# Altium PCB CNC-Control.PcbDoc
Units mil, origin at the board's own origin, x right, y up, seen from the top; angles counter-clockwise.
Board outline 5511.81 x 3543.31 mil, 2 copper layers (Top Layer, Bottom Layer); 75 components, 84 nets, 371 pads, 70 vias.
Unrouted connection lines stored in the file: 2.
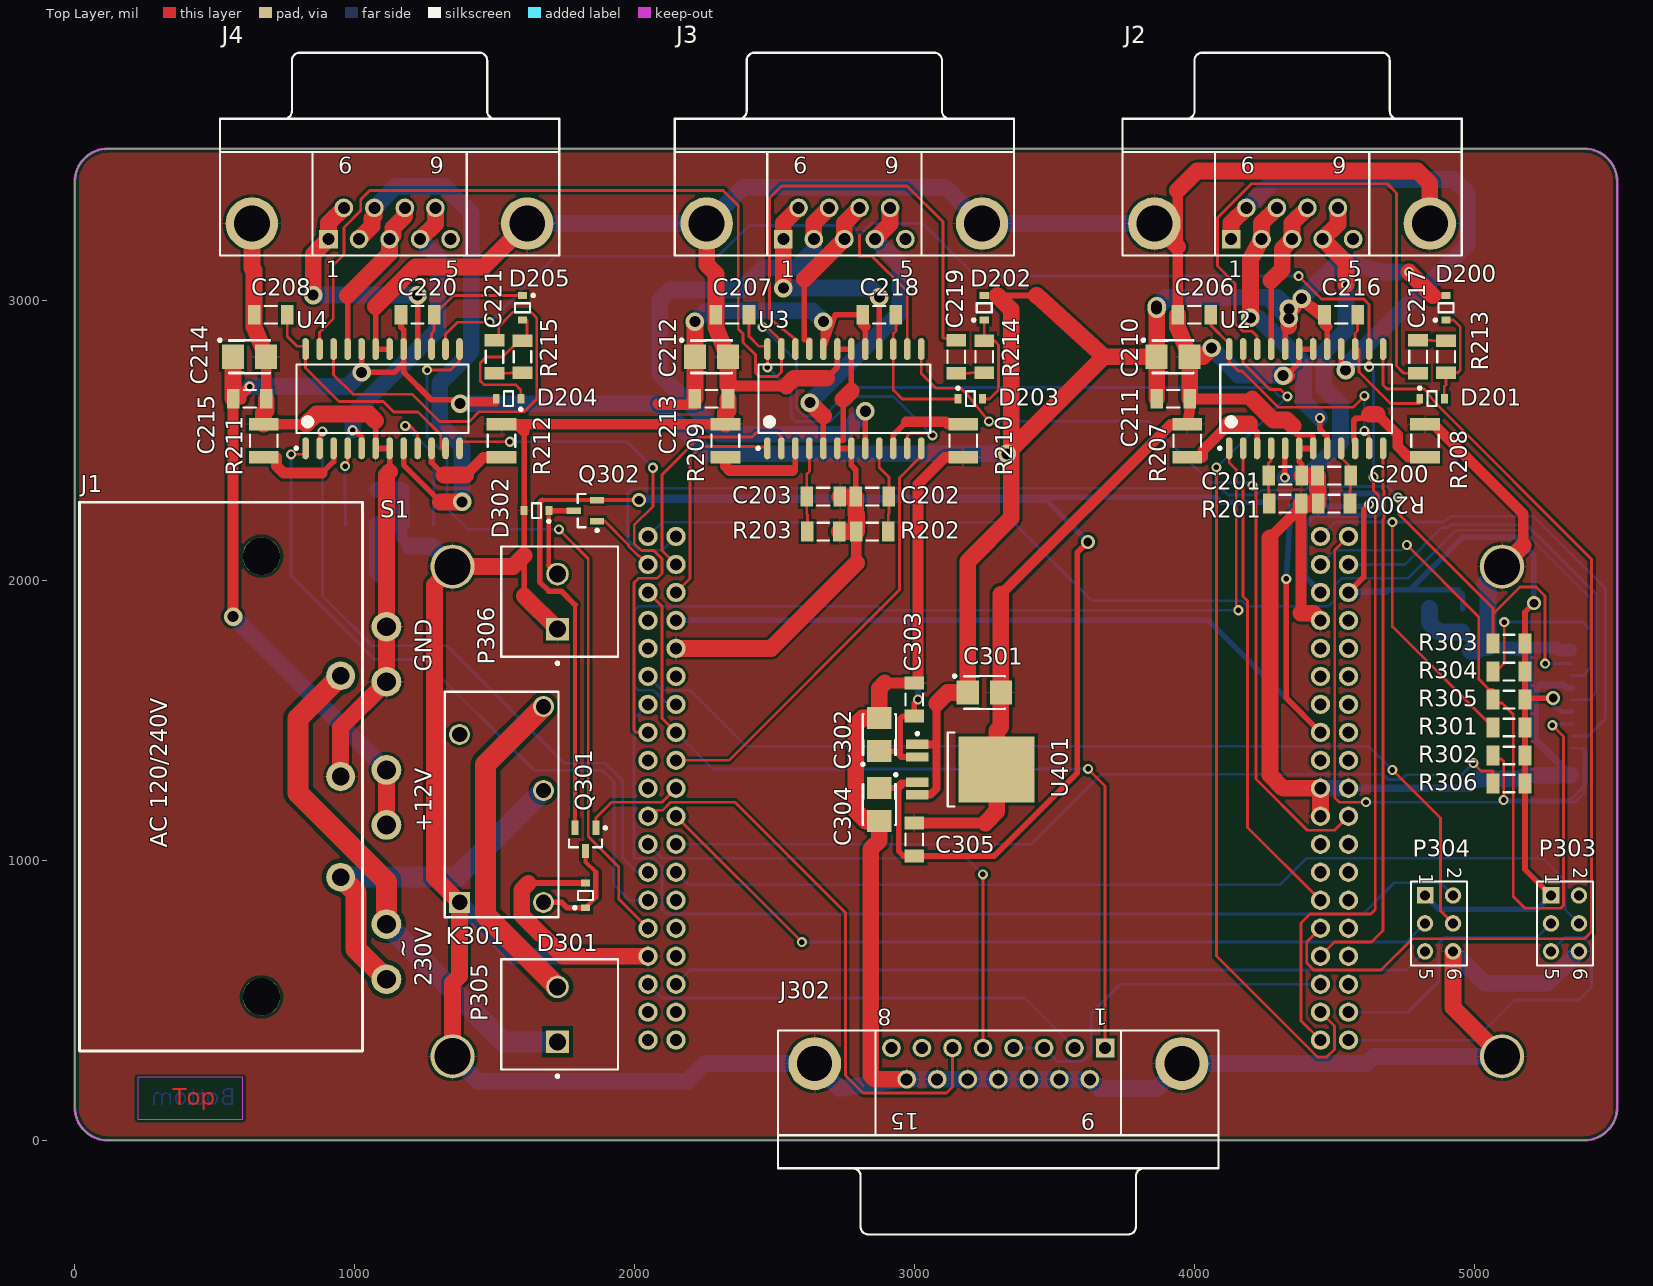
[diagram p0: Top Layer view]
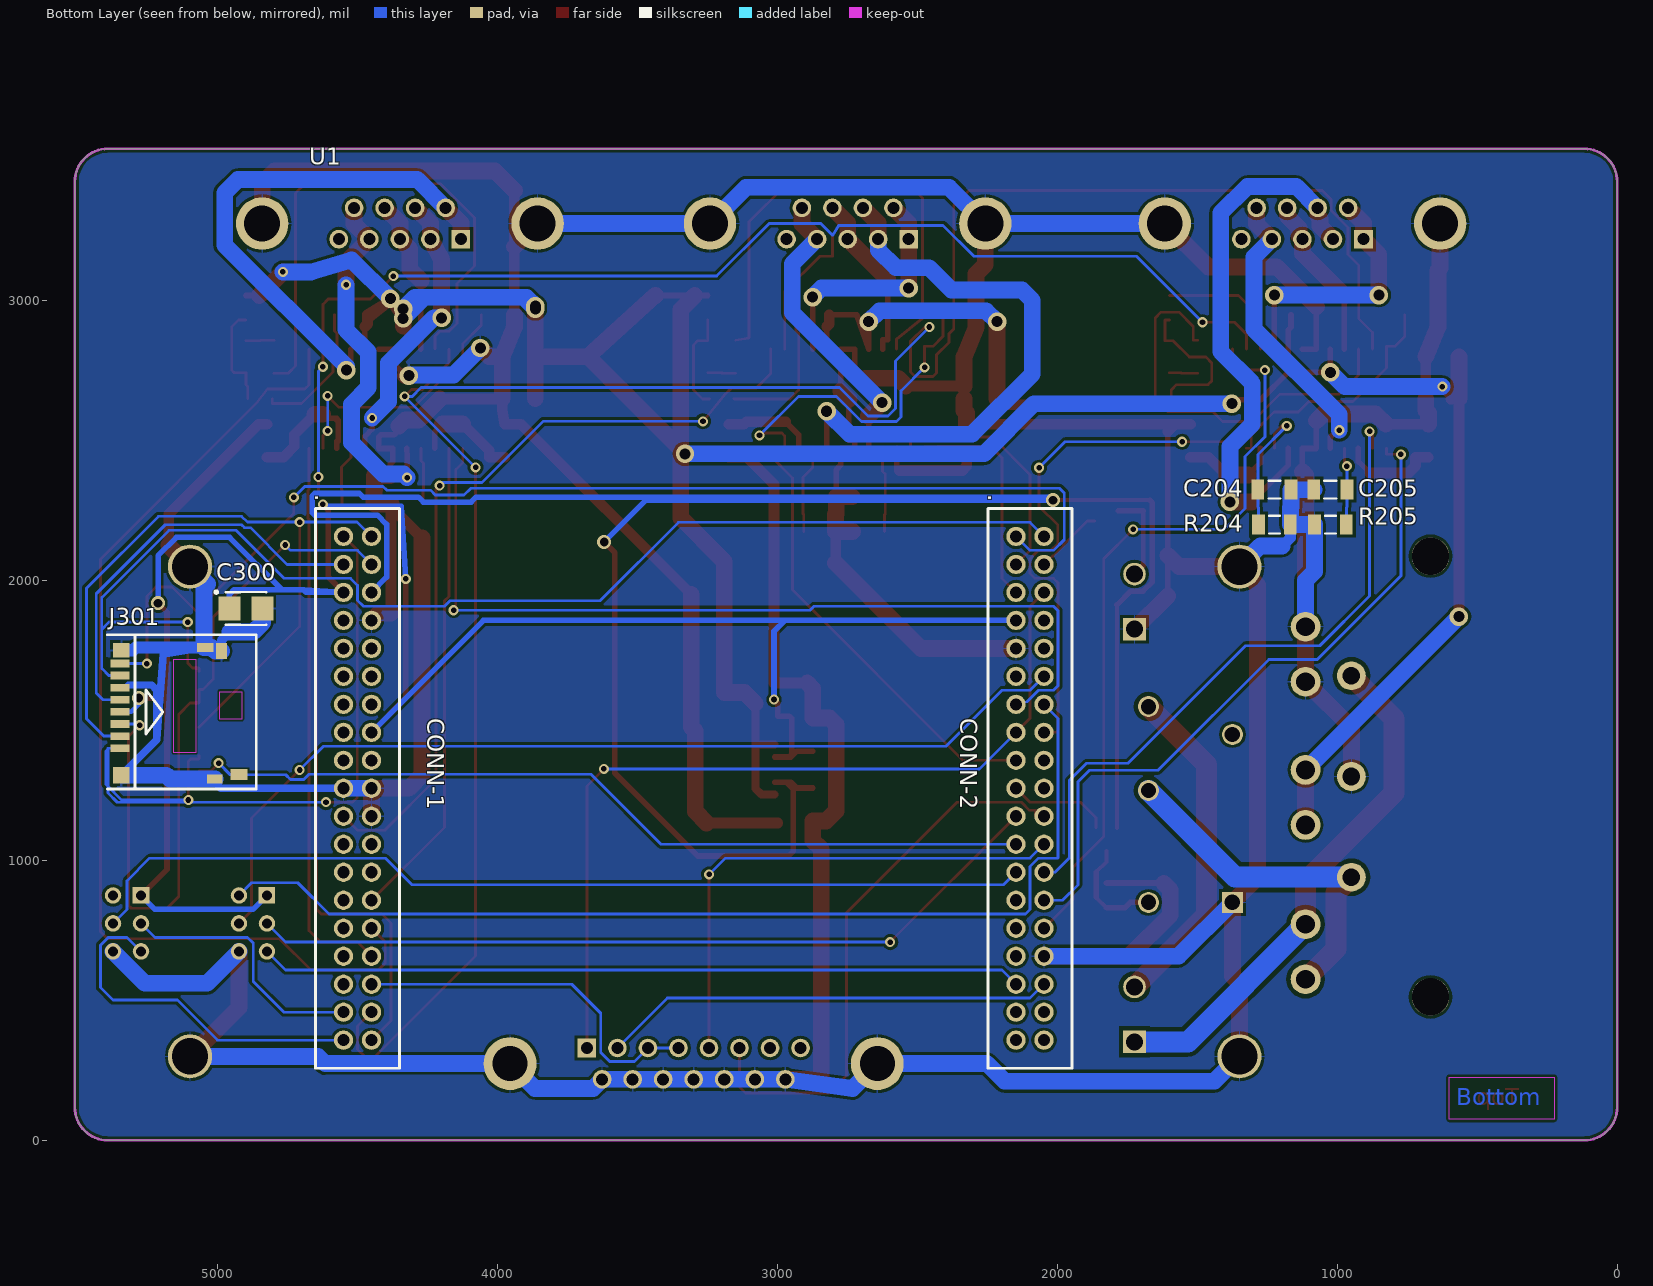
[diagram p1: Bottom Layer view, seen from below]

## Layer stack, top to bottom
Top Solder: solder mask 0.4, Solder Resist, Dk 3.5
Top Layer: signal copper 1.4
Dielectric 1: dielectric 12.6, FR-4, Dk 4.8
Bottom Layer: signal copper 1.4
Bottom Solder: solder mask 0.4, Solder Resist, Dk 3.5

## Board outline
0,118.11 0,3425.2 cw(c118.11,3425.2) 118.11,3543.31 5393.7,3543.31 cw(c5393.7,3425.2) 5511.81,3425.2 5511.81,118.11 cw(c5393.7,118.11) 5393.7,0 118.11,0 cw(c118.11,118.11)

## Design rules (kind name [scope] priority, off if disabled: settings)
Clearance Clearance_SD [InComponent('J301')] p1: gap=7.5
Clearance Clearance_High_Voltage [InNetClass('High_Voltage')] p2: gap=15
Clearance Clearance_Power_High_Current [(InNetClass('High_Current') OR InNetClass('Power'))] p3: gap=10
Clearance [All] p4: gap=8
ComponentClearance "Power SUPPLY" [InComponent('S1')] p1: gap=0 collisioncheckmode=3 verticalgap=0 showdistances=FALSE
ComponentClearance [All] p2: gap=10 collisioncheckmode=3 verticalgap=10 showdistances=FALSE
DiffPairsRouting [All] p1: maxlimit=393.7 minlimit=4.92 mostfreqgap=5.91 toplayer_minwidth=15 toplayer_maxwidth=15 toplayer_prefwidth=15 bottomlayer_minwidth=15 bottomlayer_maxwidth=15 bottomlayer_prefwidth=15 maxuncoupledlength=500
FabricationTestPointUsage FabricationTestPointUsage_1 [All] p1: valid=0 allowmultiple=FALSE
FabricationTestpoint FabricationTestpoint_1 [All] p1: side=3 testpointundercomponent=TRUE minsize=40 maxsize=100 preferedsize=60 minholesize=0 maxholesize=40 preferedholesize=32 testpointgrid=1 allowsidetop=TRUE allowsidebottom=TRUE usegrid=TRUE gridtolerance=0.01
Height [All] p1 off: minheight=0 maxheight=1000 prefheight=500
HoleSize [All] p1: absolutevalues=TRUE maxlimit=236.22 minlimit=7.87 maxpercent=80.000 minpercent=20.000
HoleSize FabricationTestpoint [All] p2 off: absolutevalues=TRUE maxlimit=100 minlimit=1 maxpercent=80.000 minpercent=20.000
HoleSize FabricationTestPointUsage [All] p3 off: absolutevalues=TRUE maxlimit=100 minlimit=1 maxpercent=80.000 minpercent=20.000
NetAntennae [All] p1 off: netantennaetolerance=0
PlaneClearance [All] p1: clearance=19.68
PlaneConnect [All] p1: planeconnectstyle=Relief reliefexpansion=15.75 reliefentries=4 reliefconductorwidth=5.91 reliefairgap=5.91
PolygonConnect [All] p1: connectstyle=Relief reliefconductorwidth=5.91 reliefentries=4 polygonreliefangle="90 Angle" airgapwidth=10
RoutingCorners [All] p1: cornerstyle=45-Degree minsetback=49.21 maxsetback=49.21
RoutingVias RoutingVias_High_Voltage [InNetClass('High_Voltage')] p1: holewidth=43.31 width=70 viastyle="Through Hole" minholewidth=43.31 minwidth=70 maxholewidth=43.31 maxwidth=70
RoutingVias RoutingVias_Power [InNetClass('Power')] p2: holewidth=31.5 width=50 viastyle="Through Hole" minholewidth=31.5 minwidth=50 maxholewidth=31.5 maxwidth=50
RoutingVias RoutingVias_High_Current [InNetClass('High_Current')] p3: holewidth=39.37 width=66 viastyle="Through Hole" minholewidth=39.37 minwidth=66 maxholewidth=39.37 maxwidth=66
RoutingVias RoutingVias_std [All] p4: holewidth=20 width=36 viastyle="Through Hole" minholewidth=12 minwidth=28 maxholewidth=16 maxwidth=32
SMDNeckDown SMDNeckDown_High_Current [InNetClass('High_Current')] p1: percent=85.000
SMDNeckDown SMDNeckDown_Power [InNetClass('Power')] p2: percent=60.000
SolderMaskExpansion [All] p1: expansion=2.95
UnpouredPolygon [All] p1: allowunpoured=FALSE
Width Width_High_Current [InNetClass('High_Current')] p1: maxlimit=100 minlimit=18 preferedwidth=60
Width Width_power [InNetClass('Power')] p2: maxlimit=25 minlimit=14 preferedwidth=20
Width Width_High_Voltage [InNetClass('High_Voltage')] p3: maxlimit=100 minlimit=50 preferedwidth=75
Width Width_others [All] p4: maxlimit=12 minlimit=8 preferedwidth=10
19 further rules are at their usual default settings.

## Classes and differential pairs
net class Power: 3V3 5V NetD301_1 NetD302_1
net class High_Current: 12V GND NetJ2_1 NetJ2_2 NetJ2_3 NetJ2_4 NetJ3_1 NetJ3_2 NetJ3_3 NetJ3_4 NetJ4_1 NetJ4_2 NetJ4_3 NetJ4_4 NetR207_1 NetR208_1 NetR209_1 NetR210_1 NetR211_1 NetR212_1
net class High_Voltage: 230V-N 230V-P NetK301_3
component class Power: C301 C302 C303 C304 C305 J1 S1 U401
component class MCU: U1
component class "Control & Sense": C200 C201 C202 C203 C204 C205 C206 C207 C208 C210 C211 C212 C213 C214 C215 C216 C217 C218 C219 C220 C221 D200 D201 D202 D203 D204 D205 J2 J3 J4 R200 R201 R202 R203 R204 R205 R207 R208 R209 R210 R211 R212 R213 R214 R215 U2 U3 U4
component class Input/Output: C300 D301 D302 J301 J302 K301 P303 P304 P305 P306 Q301 Q302 R301 R302 R303 R304 R305 R306

## Components (designator, comment, footprint, x,y, rotation, side; value= is the part's Value field where it differs from the comment)
C200 "CAP 100nF 10V 1206(3216)" CAPC1206(3216)190_N 4500,2375 r180 top
C201 "CAP 100nF 10V 1206(3216)" CAPC1206(3216)190_N 4325,2375 r0 top
C202 "CAP 100nF 10V 1206(3216)" CAPC1206(3216)190_N 2850,2300 r180 top
C203 "CAP 100nF 10V 1206(3216)" CAPC1206(3216)190_N 2675,2300 r0 top
C204 "CAP 100nF 10V 1206(3216)" CAPC1206(3216)190_N 1225,2325 r180 bottom
C205 "CAP 100nF 10V 1206(3216)" CAPC1206(3216)190_N 1025,2325 r0 bottom
C206 "CAP 100nF 10V 1206(3216)" CAPC1206(3216)190_N 4000,2950 r0 top
C207 "CAP 100nF 10V 1206(3216)" CAPC1206(3216)190_N 2350,2950 r0 top
C208 "CAP 100nF 10V 1206(3216)" CAPC1206(3216)190_N 700,2950 r0 top
C210 "T491B" B 3925,2800 r0 top
C211 "CAP 100nF 10V 1206(3216)" CAPC1206(3216)190_N 3925,2650 r180 top
C212 "T491B" B 2275,2800 r0 top
C213 "CAP 100nF 10V 1206(3216)" CAPC1206(3216)190_N 2275,2650 r180 top
C214 "T491B" B 625,2800 r0 top
C215 "CAP 100nF 10V 1206(3216)" CAPC1206(3216)190_N 625,2650 r180 top
C216 "CAP 100nF 10V 1206(3216)" CAPC1206(3216)190_N 4525,2950 r0 top
C217 "CAP 100nF 10V 1206(3216)" CAPC1206(3216)190_N 4800,2800 r270 top
C218 "CAP 100nF 10V 1206(3216)" CAPC1206(3216)190_N 2875,2950 r0 top
C219 "CAP 100nF 10V 1206(3216)" CAPC1206(3216)190_N 3150,2800 r90 top
C220 "CAP 100nF 10V 1206(3216)" CAPC1206(3216)190_N 1225,2950 r0 top
C221 "CAP 100nF 10V 1206(3216)" CAPC1206(3216)190_N 1500,2800 r90 top
C300 "T491B" B 4900,1900 r180 bottom
C301 "T491B" B 3250,1600 r0 top
C302 "T491B" B 2875,1450 r90 top
C303 "CAP 100nF 10V 1206(3216)" CAPC1206(3216)190_N 3000,1575 r270 top
C304 "T491B" B 2875,1200 r270 top
C305 "CAP 100nF 10V 1206(3216)" CAPC1206(3216)190_N 3000,1075 r270 top
D200 "NSR0340HT1G" ONSC-SOD-323-2-477-02_V 4900,2975 r90 top
D201 "NSR0340HT1G" ONSC-SOD-323-2-477-02_V 4850,2650 r0 top
D202 "NSR0340HT1G" ONSC-SOD-323-2-477-02_V 3250,2975 r90 top
D203 "NSR0340HT1G" ONSC-SOD-323-2-477-02_V 3200,2650 r0 top
D204 "NSR0340HT1G" ONSC-SOD-323-2-477-02_V 1550,2650 r180 top
D205 "NSR0340HT1G" ONSC-SOD-323-2-477-02_V 1600,2975 r270 top
D301 "NSR0340HT1G" ONSC-SOD-323-2-477-02_V 1825,875 r90 top
D302 "NSR0340HT1G" ONSC-SOD-323-2-477-02_V 1650,2250 r180 top
J1 "IEC Connector, C14" PX0580 950,1300 r90 top locked
J2 "D Connector 9" DSUB1.385-2H9 4350,3650 r0 top locked
J3 "D Connector 9" DSUB1.385-2H9 2750,3650 r0 top locked
J4 "D Connector 9" DSUB1.385-2H9 1125,3650 r0 top locked
J301 "DM3D-SF" DM3D-SF 5375,1275 r270 bottom locked
J302 "D Connector 15" DSUB1.385-2H15 3300,-100 r180 top
K301 "ALQ105" PNSC-LQ-5-2000x1000x1600_V 1375,850 r90 top
P303 "Header 3X2" HDR2X3 5275,875 r270 top
P304 "Header 3X2" HDR2X3 4825,875 r270 top
P305 "SCREW-5.0/5.08 2WAYS" SCREW-5.0-2WAYS_V 1725,450 r90 top
P306 "SCREW-5.0/5.08 2WAYS" SCREW-5.0-2WAYS_V 1725,1925 r90 top
Q301 "BSS84" SOT23_N 1825,1075 r270 top
Q302 "BSS84" SOT23_N 1825,2250 r180 top
R200 "1K 5% 1206(3216)" RESC1206(3216)_N 4500,2275 r180 top
R201 "1K 5% 1206(3216)" RESC1206(3216)_N 4325,2275 r0 top
R202 "1K 5% 1206(3216)" RESC1206(3216)_N 2850,2175 r180 top
R203 "1K 5% 1206(3216)" RESC1206(3216)_N 2675,2175 r0 top
R204 "1K 5% 1206(3216)" RESC1206(3216)_N 1225,2200 r180 bottom
R205 "1K 5% 1206(3216)" RESC1206(3216)_N 1025,2200 r0 bottom
R207 "1R 5% 1210(3225)" RESC1210(3225)_N 3975,2500 r90 top
R208 "1R 5% 1210(3225)" RESC1210(3225)_N 4825,2500 r90 top
R209 "1R 5% 1210(3225)" RESC1210(3225)_N 2325,2500 r90 top
R210 "1R 5% 1210(3225)" RESC1210(3225)_N 3175,2500 r270 top
R211 "1R 5% 1210(3225)" RESC1210(3225)_N 675,2500 r90 top
R212 "1R 5% 1210(3225)" RESC1210(3225)_N 1525,2500 r90 top
R213 "1K 5% 1206(3216)" RESC1206(3216)_N 4900,2800 r90 top
R214 "1K 5% 1206(3216)" RESC1206(3216)_N 3250,2800 r270 top
R215 "1K 5% 1206(3216)" RESC1206(3216)_N 1600,2800 r270 top
R301 "1K 5% 1206(3216)" RESC1206(3216)_N 5125,1475 r180 top
R302 "1K 5% 1206(3216)" RESC1206(3216)_N 5125,1375 r180 top
R303 "1K 5% 1206(3216)" RESC1206(3216)_N 5125,1775 r180 top
R304 "1K 5% 1206(3216)" RESC1206(3216)_N 5125,1675 r180 top
R305 "1K 5% 1206(3216)" RESC1206(3216)_N 5125,1575 r0 top
R306 "1K 5% 1206(3216)" RESC1206(3216)_N 5125,1275 r0 top
S1 "RPS-120-12" RPS-120-12 1350,300 r0 top locked
U1 "Nucleo-L476RG" NUCLEO--F103RB 3300,1400 r180 bottom locked
U2 "L6208D" SO24_L 4400,2650 r90 top
U3 "L6208D" SO24_L 2750,2650 r90 top
U4 "L6208D" SO24_L 1100,2650 r90 top
U401 "TLE4476D" INF-PG-TO252-5-11_M 3200,1325 r0 top

## Footprints (in the part's own frame and the unit in brackets; to place one, negate y for a bottom-side part, rotate by r counter-clockwise, add the part's x,y. Pads: shape width x height; smd on the part's side, far side on the other; paste and mask are expansions set on the pad)
B [mm] "Capacitor, SM Tantalum; Body 3.5 x 2.8 mm (LxW typ)"
  rect 2x2.2 smd: 1(-1.5,0) 2(1.5,0)
  silkscreen extent -2.82,-1.5 1.85,1.62
CAPC1206(3216)190_N [mm] "Chip Capacitor, Body 3.2x1.6mm, Height 1.9mm, IPC Medium Density"
  rect 1.15x1.8 smd: 1(-1.5,0) 2(1.5,0)
  silkscreen extent -0.55,-0.8 0.55,0.8, body extent -1.7,-0.9 1.7,0.9, height 1.9
DM3D-SF [mm] "MicroSD card connector"
  rect 0.7x1.75 smd: 1(-3.2,0.625) 2(-4.3,0.625) 3(-5.4,0.625) 4(-6.5,0.625) 5(-7.6,0.625) 6(-8.7,0.625) 7(-9.8,0.625) 8(-10.9,0.625)
  rect 1x1.55 smd: A(-0.8,11.425)
  rect 1.45x1 smd: B(-12.025,9.85)
  rect 1.5x1.5 smd: G0(-0.75,0.75)
  rect 1.3x1.5 smd: G1(-12.1,0.75)
  rect 0.8x1.4 smd: G2(-0.4,9.25)
  rect 0.8x1.5 smd: G3(-12.35,8.35)
  Top Layer keep-out region: -11.3,7.5 -2.8,7.5 -2.8,5.5 -11.3,5.5
  Top Layer keep-out region: -8.35,11.7 -5.85,11.7 -5.85,9.7 -8.35,9.7
  silkscreen extent -13.5,-0.5 0.5,13
DSUB1.385-2H9 [mm] "Connector; D Subminiature; 9 Position; Right Angle; Pitch 1.385 mm"
  rect 1.69x1.69 hole 1.09: 1(-5.54,-10.92)
  round 1.69 hole 1.09: 2(-2.77,-10.92) 3(0,-10.92) 4(2.77,-10.92) 5(5.54,-10.92) 6(-4.155,-8.08) 7(-1.385,-8.08) 8(1.385,-8.08) 9(4.155,-8.08)
  round 4.76 hole 3.26: 10(-12.495,-9.5) 11(12.495,-9.5)
  silkscreen extent -15.4,-12.4 15.4,6
DSUB1.385-2H15 [mm] "Connector; D Subminiature; 15 Position; Right Angle; Pitch 1.385 mm"
  rect 1.69x1.69 hole 1.09: 1(-9.695,-10.92)
  round 1.69 hole 1.09: 2(-6.925,-10.92) 3(-4.155,-10.92) 4(-1.385,-10.92) 5(1.385,-10.92) 6(4.155,-10.92) 7(6.925,-10.92) 8(9.695,-10.92) 9(-8.31,-8.08) 10(-5.54,-8.08) 11(-2.77,-8.08) 12(0,-8.08) 13(2.77,-8.08) 14(5.54,-8.08) 15(8.31,-8.08)
  round 4.8 hole 3.18: 16(-16.66,-9.5) 17(16.66,-9.5)
  silkscreen extent -20,-12.5 20,6
HDR2X3 [mm] "Connector; Header; 3x2 Position"
  rect 1.5x1.5 hole 0.9: 1(0,0)
  round 1.5 hole 0.9: 2(0,2.54) 3(2.54,0) 4(2.54,2.54) 5(5.08,0) 6(5.08,2.54)
  silkscreen extent -1.27,-1.27 6.35,3.81
INF-PG-TO252-5-11_M [mm] "DPAK, 5-Leads, Body 6.5x6.12mm, Pitch 1.14mm, IPC Low Density"
  rect 2.05x0.85 smd: 1(-4.8,2.28) 2(-4.8,1.14) 4(-4.8,-1.14) 5(-4.8,-2.28)
  rect 6.9x5.95 smd: 3(2.4,0)
  silkscreen extent -4.92,-3.35 -1.45,3.38, body extent -2.05,-3.32 4.17,3.32, height 2.35
NUCLEO--F103RB [mm]
  round 1.75 hole 1.1: 1.1(-31.79,19.25) 1.2(-29.25,19.25) 1.3(-31.79,16.71) 1.4(-29.25,16.71) 1.5(-31.79,14.17) 1.6(-29.25,14.17) 1.7(-31.79,11.63) 1.8(-29.25,11.63) 1.9(-31.79,9.09) 1.10(-29.25,9.09) 1.11(-31.79,6.55) 1.12(-29.25,6.55) 1.13(-31.79,4.01) 1.14(-29.25,4.01) 1.15(-31.79,1.47) 1.16(-29.25,1.47) 1.17(-31.79,-1.07) 1.18(-29.25,-1.07) 1.19(-31.79,-3.61) 1.20(-29.25,-3.61) 1.21(-31.79,-6.15) 1.22(-29.25,-6.15) 1.23(-31.79,-8.69) 1.24(-29.25,-8.69) 1.25(-31.79,-11.23) 1.26(-29.25,-11.23) 1.27(-31.79,-13.77) 1.28(-29.25,-13.77) 1.29(-31.79,-16.31) 1.30(-29.25,-16.31) 1.31(-31.79,-18.85) 1.32(-29.25,-18.85) 1.33(-31.79,-21.39) 1.34(-29.25,-21.39) 1.35(-31.79,-23.93) 1.36(-29.25,-23.93) 1.37(-31.79,-26.47) 1.38(-29.25,-26.47) 2.1(29.25,19.25) 2.2(31.79,19.25) 2.3(29.25,16.71) 2.4(31.79,16.71) 2.5(29.25,14.17) 2.6(31.79,14.17) 2.7(29.25,11.63) 2.8(31.79,11.63) 2.9(29.25,9.09) 2.10(31.79,9.09) 2.11(29.25,6.55) 2.12(31.79,6.55) 2.13(29.25,4.01) 2.14(31.79,4.01) 2.15(29.25,1.47) 2.16(31.79,1.47) 2.17(29.25,-1.07) 2.18(31.79,-1.07) 2.19(29.25,-3.61) 2.20(31.79,-3.61) 2.21(29.25,-6.15) 2.22(31.79,-6.15) 2.23(29.25,-8.69) 2.24(31.79,-8.69) 2.25(29.25,-11.23) 2.26(31.79,-11.23) 2.27(29.25,-13.77) 2.28(31.79,-13.77) 2.29(29.25,-16.31) 2.30(31.79,-16.31) 2.31(29.25,-18.85) 2.32(31.79,-18.85) 2.33(29.25,-21.39) 2.34(31.79,-21.39) 2.35(29.25,-23.93) 2.36(31.79,-23.93) 2.37(29.25,-26.47) 2.38(31.79,-26.47)
  Mechanical 13 keep-out region: 30,50 33,50 33,44 30,44
  Mechanical 13 keep-out region: -33,50 -30,50 -30,44 -33,44
  silkscreen extent -34.33,-29.01 34.33,21.79
ONSC-SOD-323-2-477-02_V [mm] "SOD, 2-Leads, Body 1.7x1.25mm"
  rect 0.63x0.83 smd: 1(-1.115,0) 2(1.115,0)
  silkscreen extent -1.24,-0.68 0.4,1.09, body extent -0.85,-0.63 0.85,0.63, height 1.06
PNSC-LQ-5-2000x1000x1600_V [mm] "LQ, 5-Leads, Body 20x10mm"
  rect 1.9x1.9 hole 1.4: 1(0,0)
  round 1.9 hole 1.4: 2(15.24,0) 3(17.78,-7.62) 4(10.16,-7.62) 5(0,-7.62)
  silkscreen extent -1.35,-8.97 19.13,1.35, body extent -1.11,-8.81 18.89,1.19, height 16.6
PX0580 [mm] "IEC C14 connector, PC flange rear mount"
  round 2.616 hole 1.6: 1(-9.14,0) 2(9.14,0) 3(0,0)
  round 3.4 hole 3.4 unplated: H1(-20,7.18) H2(20,7.18)
  silkscreen extent -24.9,-2 24.9,23.7
RESC1206(3216)_N [mm] "Chip Resistor, Body 3.2x1.6mm, IPC Medium Density"
  rect 1.15x1.8 smd: 1(-1.45,0) 2(1.45,0)
  silkscreen extent -0.5,-0.8 0.5,0.8, body extent -1.67,-0.87 1.67,0.87, height 0.75
RESC1210(3225)_N [mm] "Chip Resistor, Body 3.2x2.5mm, IPC Medium Density"
  rect 1.15x2.7 smd: 1(-1.5,0) 2(1.5,0)
  silkscreen extent -0.55,-1.25 0.55,1.25, body extent -1.7,-1.35 1.7,1.35, height 0.71
RPS-120-12 [mm] "Power Supply, 120w, 12V/10A"
  round 2.7 hole 1.7: 1(-6,7) 2(-6,12) 3(-6,21) 4(-6,26) 5(-6,34) 6(-6,39)
  round 4 hole 3.3: H1(0,0) H2(95.25,0) H3(95.25,44.45) H4(0,44.45)
SCREW-5.0-2WAYS_V [mm] "Socket, Screw Terminal Block, 2-Leads, Pitch 5mm, 90 Degree Angle, Through-Hole"
  rect 2.05x2.05 hole 1.55: 1(-2.5,0)
  round 2.05 hole 1.55: 2(2.5,0)
  silkscreen extent -5.72,-5.5 5,5.1, body extent -5,-5.5 5.02,5.1, height 18.2
SO24_L [mm] "SOIC, 24-Leads, Body 15.4x7.5mm, Pitch 1.27mm, IPC High Density"
  oval 2x0.6 smd: 1(-4.5,6.985) 2(-4.5,5.715) 3(-4.5,4.445) 4(-4.5,3.175) 5(-4.5,1.905) 6(-4.5,0.635) 7(-4.5,-0.635) 8(-4.5,-1.905) 9(-4.5,-3.175) 10(-4.5,-4.445) 11(-4.5,-5.715) 12(-4.5,-6.985) 13(4.5,-6.985) 14(4.5,-5.715) 15(4.5,-4.445) 16(4.5,-3.175) 17(4.5,-1.905) 18(4.5,-0.635) 19(4.5,0.635) 20(4.5,1.905) 21(4.5,3.175) 22(4.5,4.445) 23(4.5,5.715) 24(4.5,6.985)
  silkscreen extent -4.62,-7.8 3.1,7.96, body extent -3.8,-7.8 3.8,7.8, height 2.65
SOT23_N [mm] "SOT23, 3-Leads, Body 2.9x1.3mm, Pitch 0.95mm, Lead Span 2.3mm, IPC Medium Density"
  rect 1.3x0.6 smd: 1(-1.05,0.95) 2(-1.05,-0.95) 3(1.05,0)
  silkscreen extent -1.17,-1.5 0.7,1.93, body extent -0.7,-1.5 0.7,1.5, height 1.1

## Part data
C200 C201 C202 C203 C204 C205 C206 C207 C208 C211 C213 C215 C216 C217 C218 C219 C220 C221 C303 C305: library part CMP-1037-04171-1, "CAP 100nF 10V ±5% 1206 (3216 Metric) Thickness 1.9mm SMD"
C210 C212 C214 C300 C301 C302 C304: "Solid Tantalum Chip Capacitor, Standard T491 Series - Industrial Grade"
D200 D201 D202 D203 D204 D205 D301 D302: library part CMP-1055-00472-1, "Schottky Barrier Diode, 2-Pin SOD-323, Pb-Free, Tape and Reel"
J1: library part PX0580/PC/12132, "IEC C14, Right Angle Male, Mounting Holes"
J2 J3 J4: "Receptacle Assembly, 9 Position, Right Angle"
J302: "Receptacle Assembly, 15 Position, Right Angle"
K301: library part CMP-1503-00191-1, "LQ Relays, 5 V Coil Voltage, 400 mW Nominal Operating Power, -40 to 85 degC, 5-Pin LQ, Carton, Case, RoHS"
P303 P304: "Header, 3-Pin, Dual row"
P305 P306: library part CMP-0617-00009-1, "Socket, Screw Terminal Block, 2 Way, 5.0 mm Pitch, 90 Degree Angle, Through-Hole"
Q301 Q302: "P-channel Enhancement Mode Vertical D-MOSFET"
R200 R201 R202 R203 R204 R205 R213 R214 R215 R301 R302 R303 R304 R305 R306: library part CMP-1014-00074-1, "1K 0.25W 5% 1206 (3216 Metric)  SMD"
R207 R208 R209 R210 R211 R212: library part CMP-1015-00002-1, "1R 0.5W 5% 1210 (3225 Metric)  SMD"
S1: "Power supply, 120 W, 12V/10A, unenclosed"
U1: library part Nucleo-F103RB
U2 U3 U4: "Stepper controler"
U401: library part CMP-1109-00149-1, "Dual Low Drop Voltage Regulator, 4.5 to 42 V / 5.7 to 42 V Supply, 3.3 V 5 V Output, -40 to 150 degC, PG-TO252-5-11, Reel, Green"

## Via types
v1: diameter 36, hole 20, Top Layer to Bottom Layer, tented both sides, 44 vias
v2: diameter 66, hole 39.37, Top Layer to Bottom Layer, tented both sides, 22 vias
v3: diameter 50, hole 31.5, Top Layer to Bottom Layer, tented both sides, 4 vias

## Nets (pads, with @x,y where several pads share a name; then routed paths per layer and width w, separated by ;. In a path a pad name is that pad's centre, name@x,y a point inside that pad or via, vN(x,y) a via of type N, cw(c..) or ccw(c..) an arc to the next point about the centre after c; other vN are vias at no path point)
3V3: C300.1 C302.1 C303.2 J301.4 P303.1 P304.1 R301.1 R302.1 R303.1 R304.1 R305.2 R306.2 U1.1.5 U1.1.16 U1.2.7 U401.2 | length 7777
  Top Layer w20: C302.1 2932.05,1390.94 2953.11,1369.88 2958.05,1369.88 ; U401.2 2958.05,1369.88 ; v1(3013.05,1575.2) 3000,1562.15 C303.2 2958.05,1515.94 2950.05,1507.94 2950.05,1377.88 2958.05,1369.88 ; v1(4329.05,2006.2) 4329.05,1580.4 U1.1.16 ; U1.1.5 4606.05,2012.35 4606.05,2253.2 v1(4625.05,2272.2) ; v3(5214.05,1919.24) 5182.09,1887.28 R303.1 R304.1 R305.2@5182.09,1580.2 ; P303.1 5182.09,967.91 R306.2 R302.1 R301.1 R305.2 R305.2@5182.09,1580.2 ; v3(5283.05,1580.2) R305.2@5182.09,1580.2
  Bottom Layer w16.54: v3(5283.05,1580.2) 5283.05,1557.2 5309.34,1530.9 J301.4
  Bottom Layer w20: U1.2.7 2974.05,1857.87 ; v1(3013.05,1575.2) 3013.05,1818.87 2974.05,1857.87 ; v1(4329.05,2006.2) 4345.05,2266.2 4619.05,2266.2 v1(4625.05,2272.2) ; U1.1.16 4051.58,1857.87 2974.05,1857.87 ; P304.1 4874.8,825.2 5225.2,825.2 P303.1 ; C300.1 4959.06,1950.19 4942.05,1967.2 4771.05,1967.2 ; v3(5214.05,1919.24) 5214.05,2089.2 5148.55,2154.7 4958.55,2154.7 4771.05,1967.2 ; 4694.05,1967.2 4684.73,1957.87 U1.1.5 4694.05,1967.2 ; 4694.05,1967.2 4771.05,1967.2
5V: C304.1 C305.2 Q301.2 Q302.2 U1.1.6 U401.4 | length 8560.2
  Top Layer w14.17: 1670.05,2287.4 Q302.2 v3(2016.25,2287.4) ; Q301.2 1787.6,1913.2
  Top Layer w20: 1670.05,2287.4 1661.05,2278.4 1661.05,1995.2 1694.05,1962.2 1738.6,1962.2 1787.6,1913.2 ; C304.1 2932.05,1259.05 2953.11,1280.12 2969.97,1280.12 ; U401.4 2969.97,1280.12 ; v3(3620.05,2138.2) 3582.25,2100.4 3582.25,1312.4 3285.8,1015.94 C305.2 2961.3,1015.94 2944.05,1033.2 2944.05,1254.2 2969.97,1280.12
  Bottom Layer w20: v3(3620.05,2138.2) 3470.84,2287.4 v3(2016.25,2287.4) 2027.05,2298.2 4077.99,2298.2 4095.5,2280.68 4266,2280.68 4283.51,2298.2 4481.56,2298.2 4494.56,2311.2 4654.05,2311.2 4663.05,2302.2 4663.05,2243.2 4654.05,2234.2 4430.13,2234.2 4397.13,2201.2 4397.13,2012.32 U1.1.6
12V: C210.1 C211.2 C212.1 C213.2 C214.1 C215.2 C216.1 C218.1 C220.1 C301.1 D200.2 D202.2 D204.2 S1.3 S1.4 U2.17 U2.20 U3.17 U3.20 U4.17 U4.20 U401.1 U401.5 | length 12229.7
  Top Layer w20.08: U4.20 v2(1025,2744.15) 1141.95,2744.15 1175,2777.2 ; C220.1 1165.95,2905.25 1175,2896.2 U4.17 1175,2777.2 ; 1274,2646.2 1175,2745.2 1175,2777.2 ; v2(2675,2925.2) U3.20 2705.56,2914.5 2718.05,2950.2 C218.1 ; U3.17 2825,2908.14 ; U2.20 4325,2896.2 v2@4338.05,2909.24 ; U2.17 4475,2908.14
  Top Layer w21.08: 1274,2646.2 D204.2@1506.1,2646.2 ; v2(1377.05,2632.2) 1506.1,2632.2 D204.2@1506.1,2646.2 ; D204.2 D204.2@1506.1,2646.2 ; D202.2 3296.35,3018.9 3437.05,3018.9 ; 4852.35,3018.9 D200.2
  Top Layer w28.44: U401.5 3058.09,1235.24 3080.05,1257.2 3080.05,1414.76 ; U401.1 3080.05,1414.76 ; 3080.05,1561.2 3080.05,1414.76
  Top Layer w38.48: v2(565.95,1871.46) C215.2@565.95,2649.2 ; C215.2 C215.2@565.95,2649.2 ; v1(625.05,2693.2) 595.05,2663.2 595.05,2649.2 C215.2@565.95,2649.2 ; 2084.05,2632.2 2088.05,2628.2 2215.95,2628.2 C213.2 ; C218.1 2815.95,2917.2 2825,2908.14 ; v2(4338.05,2937.2) 4354.16,2959.62 v2@4384.05,3001.2 ; v2(4384.05,3007.2) v2@4384.05,3001.2 ; 4475,2908.14 4465.95,2917.2 C216.1@4465.95,2937.2 ; v2@4384.05,3001.2 4459.73,2942.05 C216.1@4465.95,2937.2 ; v2@4384.05,3001.2 C216.1 C216.1@4465.95,2937.2
  Top Layer w60: C215.2 C214.1 ; S1.3 S1.4 ; C213.2 C212.1 v2(2215.95,2925.2) ; 3080.05,1561.2 3118.85,1600 C301.1 3190.95,2069.09 3346.05,2224.2 v2@3346.05,2468.09 ; 3296.35,3018.9 3346.05,2969.2 v2@3346.05,2468.09 ; v2(3331.15,2453.2) v2@3346.05,2468.09 ; 3437.05,3018.9 3677.95,2800 ; C211.2 C210.1 ; v2(3865.95,2980.54) v2(3865.95,2971.2) C210.1 ; v2@4338.05,2909.24 v2(4338.05,2937.2) v2(4338.05,2971.2) ; v1(4768.05,3103.2) 4852.35,3018.9 ; v2@3346.05,2468.09 3677.95,2800 ; 3677.95,2800 C210.1
  Bottom Layer w60: v2(565.95,1871.46) S1.4 ; v1(625.05,2693.2) 974.05,2693.2 v2(1025,2744.15) ; v2(1377.05,2632.2) 2084.05,2632.2 2263.05,2453.2 v2(3331.15,2453.2) ; v2(2215.95,2925.2) 2254.95,2964.2 2636,2964.2 v2(2675,2925.2) ; v2(3865.95,2971.2) 3906.95,3012.2 ; v2(3865.95,2980.54) 3897.61,3012.2 3906.95,3012.2 ; v2(4338.05,2937.2) 4263.05,3012.2 ; v2(4338.05,2971.2) 4297.05,3012.2 4263.05,3012.2 ; v2(4384.05,3007.2) 4523.05,3146.2 4668.05,3103.2 v1(4768.05,3103.2) ; 3906.95,3012.2 4263.05,3012.2
230V-N: J1.2 P305.1 S1.2 | length 1866.7
  Top Layer w75: J1.2 798.05,1507.89 798.05,1241.2 1113.78,925.46 S1.2
  Bottom Layer w75: S1.2 1534.65,351.57 P305.1
230V-P: J1.1 K301.4 S1.1 | length 1285.7
  Top Layer w75: J1.1 1005.05,885.11 1005.05,684.32 S1.1
  Bottom Layer w75: J1.1 1365.16,940.16 K301.4
DRILL_ENABLE: Q301.1 U1.2.19 | length 365.9
  Top Layer w10: Q301.1 1862.4,1152.55 1918.05,1208.2 2098.75,1208.2 U1.2.19
GND: C200.2 C201.2 C202.2 C203.2 C204.2 C205.2 C206.1 C207.1 C208.1 C210.2 C211.1 C212.2 C213.1 C214.2 C215.1 C300.2 C301.2 C302.2 C303.1 C304.2 C305.1 D301.2 D302.2 J1.3 J2.10 J2.11 J3.10 J3.11 J4.10 J4.11 J301.6 J301.B J301.G0 J301.G1 J301.G2 J301.G3 J302.9 J302.10 J302.11 J302.12 J302.13 J302.14 J302.15 J302.16 J302.17 K301.1 P303.6 P304.6 P306.1 R200.2 R201.2 R202.2 R203.2 R204.2 R205.2 R207.2 R208.2 R209.2 R210.2 R211.2 R212.2 S1.5 S1.6 S1.H1 S1.H2 S1.H3 S1.H4 U1.1.8 U1.1.19 U1.1.20 U1.1.22 U1.2.9 U1.2.32 U2.6 U2.7 U2.18 U2.19 U3.6 U3.7 U3.18 U3.19 U4.6 U4.7 U4.18 U4.19 U401.3 | length 33573
  Top Layer w20.08: 1075,2571.24 U4.6 1075,2472.2 U4.7@1125,2472.2 ; 1075,2978.62 U4.19 1075,2826.2 1125,2826.2 U4.18 ; 1125,2389.15 U4.7@1125,2472.2 ; U4.7 U4.7@1125,2472.2 ; 2686.05,2723.24 2725,2762.2 U3.19@2725,2826.2 ; U3.19 U3.19@2725,2826.2 ; 2745.56,2647.76 2745.56,2502.17 2725,2502.17 U3.6 2725,2472.2 U3.7@2775,2472.2 ; U3.7 U3.7@2775,2472.2 ; 2775,2677.2 U3.18@2775,2826.2 ; U3.18 U3.18@2775,2826.2 ; C202.2 2790.95,2396.25 2775,2412.2 U3.7@2775,2472.2 ; v2@4330,2732.2 4375,2777.2 U2.19@4375,2826.2 ; 4353.05,2552.2 4353.05,2537.2 4369.05,2521.2 4417,2521.2 4425,2513.2 U2.7 4425,2472.2 U2.6@4375,2472.2 ; U2.6 U2.6@4375,2472.2 ; U2.19 U2.19@4375,2826.2 ; C201.2 4384.06,2416.2 4375,2425.25 U2.6@4375,2472.2 ; U2.18 4425,2826.2 U2.19@4375,2826.2 ; U3.19@2725,2826.2 U3.18@2775,2826.2
  Top Layer w21.08: 1606.1,1945.47 1606.1,2090.06 D302.2 1606.1,2532.11 ; 1620.75,918.9 D301.2
  Top Layer w38.48: R211.2 826.92,2559.05 ; C215.1 684.06,2662.8 684.29,2663.03 C214.2@684.29,2800 ; R212.2 1579.16,2559.05 ; 1606.1,2532.11 1579.16,2559.05 ; R209.2 1579.16,2559.05 ; C213.1 2334.06,2694.95 2542.24,2694.95 ; 2792.91,2063.06 R202.2 ; 2894.05,1634.05 C303.1 3013.05,1634.05 3013.05,2343.94 3110.05,2440.94 R210.2 ; C305.1 3253.91,1134.05 ; 3309.06,1951.2 3916.91,2559.05 R207.2 3984.06,2608.25 C211.1@3984.06,2649.2 ; C206.1 3940.95,3193.11 3940.95,3394.09 ; C211.1 C211.1@3984.06,2649.2 ; 4207.41,2649.2 C211.1@3984.06,2649.2 ; 4271.05,2152.2 R201.2@4382.05,2263.2 ; 4382.09,1884.16 R201.2@4382.09,2263.2 ; R201.2 R201.2@4382.09,2263.2 ; R200.2 4442.91,2263.2 R201.2@4382.09,2263.2 ; R208.2 4855.05,2559.05 5176.05,2238.05 5176.05,2126.05
  Top Layer w60: J4.10 633.07,3116.07 640.95,3108.2 C208.1 640.95,2905.2 C214.2 C214.2@684.29,2800 ; R211.2 675,2599.2 684.06,2608.25 C215.1 ; 826.92,2559.05 863.06,2595.2 1051.05,2595.2 1075,2571.24 ; J1.3 950,1474.8 S1.5 S1.6 1113.78,2377.93 1125,2389.15 ; 1075,2978.62 1216.58,3120.2 1461.14,3120.2 J4.11 ; S1.H1 1350,562.2 1375,587.2 K301.1 1285.05,939.95 1285.05,1985.05 S1.H4 1566.05,2050 1606.1,2090.06 ; 1606.1,1945.47 P306.1 ; 1620.75,918.9 1597.05,895.2 1597.05,805.2 1744.37,657.87 U1.2.32 ; U1.2.9 2487.73,1757.87 2792.91,2063.06 ; J3.10 2258.07,3129.07 2290.95,3096.2 C207.1 2290.95,2905.2 C212.2 2334.06,2694.95 ; R209.2 2325,2599.2 2334.06,2608.25 C213.1 ; 2542.24,2694.95 2570.54,2723.24 2686.05,2723.24 ; R203.2 R202.2 2792.91,2236.2 2790.95,2238.16 C202.2 C203.2 ; 2745.56,2647.76 2775,2677.2 ; 2894.05,1634.05 2875,1615.01 C302.2 2814.05,1509.05 2791.05,1486.05 2791.05,1177.2 2827.3,1140.94 C304.2 2875,1071.2 2844.05,1040.24 2844.05,233.02 2858.96,218.11 J302.15 ; 3253.91,1134.05 3294.49,1174.64 U401.3 3294.49,1462.2 3309.06,1476.76 C301.2 3309.06,1951.2 ; J2.10 3940.95,3193.11 ; C206.1 3940.95,2905.2 C210.2 ; 3940.95,3394.09 4010.05,3463.2 4798.05,3463.2 4841.93,3419.31 J2.11 ; C211.1 C210.2 ; v2(4062.24,2831.2) 4031.05,2800 C210.2 ; 4207.41,2649.2 4282.41,2574.2 4331.05,2574.2 4353.05,2552.2 ; 4271.05,2152.2 4271.05,1304.87 4318.05,1257.87 U1.1.20 U1.1.22 ; v2(4318.05,2732.2) v2@4330,2732.2 ; 4382.09,1884.16 4383.05,1883.2 4426.25,1883.2 U1.1.8 ; R201.2 R200.2 4442.91,2323.2 4440.95,2325.16 C200.2 C201.2 ; P304.6 4925,475 S1.H2 ; S1.H3 5176.05,2126.05
  Bottom Layer w23.43: 5236.33,1626.91 5320.37,1626.91 5329.76,1617.52 J301.6
  Bottom Layer w26.77: U1.1.19 4990.05,1257.87 4999.05,1266.87 4999.05,1290.75 J301.G2 ; J301.G3@5050.05,1761.22 J301.G3 5196.05,1737.2 5218.05,1431.95 ; 5236.33,1626.91 5218.05,1608.62 5218.05,1431.95 ; J301.G0 5218.05,1431.95
  Bottom Layer w33.46: 4958.05,1816.2 4987.21,1787.04 J301.B
  Bottom Layer w38.48: R204.2 1167.91,2153.2 1197.16,2123.95
  Bottom Layer w43.5: J301.G3@5050.05,1761.22 5294.05,1761.22 5303.89,1751.38 J301.G1
  Bottom Layer w60: C205.2 C204.2 1165.95,2263.16 1167.91,2261.2 R204.2 R205.2 1082.09,2032.89 1113.78,2001.2 S1.6 ; 1197.16,2123.95 1276.05,2123.95 S1.H4 ; S1.H1 1438.8,211.2 2190.05,211.2 2252.87,274.01 J302.17 2733.05,185.06 J302.15 J302.14 J302.13 J302.12 J302.11 J302.10 J302.9 3660.12,185.16 3867.05,185.16 J302.16 4616.87,274.01 4642.85,300 S1.H2 ; K301.1 1567.13,657.87 U1.2.32 ; J4.11 J3.10 2387.28,3405.2 3112.72,3405.2 J3.11 J2.10 ; v2(4062.24,2831.2) 4158.24,2735.2 4315.05,2735.2 v2(4318.05,2732.2) ; U1.1.20 U1.1.19 ; C300.2 4840.95,1849.2 4873.95,1816.2 4958.05,1816.2 ; P304.6 5038.8,561.2 5261.2,561.2 P303.6 ; J301.B 5010.05,1748.42 5022.84,1761.22 J301.G3 ; J301.G2 5171.05,1290.75 5184.83,1304.53 J301.G0 ; J301.G3@5050.05,1761.22 5050.05,1975.05 5037.55,1987.55 S1.H3
LASER_ENABLE: Q302.1 U1.2.4 | length 248.4
  Top Layer w10: Q302.1 1893.7,2212.6 1978.44,2127.86 1978.44,2124.03 2014.05,2088.42 2017.88,2088.42 U1.2.4
NetC200_1: C200.1 R200.1 U2.9 | length 212.8
  Top Layer w10: U2.9 4525,2440.25 4559.06,2406.2 C200.1 4559.06,2325.16 4557.09,2323.2 R200.1
NetC201_1: C201.1 R201.1 U2.4 | length 202.4
  Top Layer w10: R201.1 4267.91,2323.2 4265.95,2325.16 C201.1 4265.95,2419.2 4275,2428.25 U2.4
NetC202_1: C202.1 R202.1 U3.9 | length 312.8
  Top Layer w10: U3.9 2875,2403.25 2909.06,2369.2 C202.1 2909.06,2238.16 2907.09,2236.2 R202.1
NetC203_1: C203.1 R203.1 U3.4 | length 302.4
  Top Layer w10: R203.1 2617.91,2236.2 2615.95,2238.16 C203.1 2615.95,2381.2 2625,2390.25 U3.4
NetC204_1: C204.1 R204.1 U4.9 | length 504.6
  Top Layer w10: v1(1181.05,2553.2) 1197.05,2553.2 1225,2525.24 U4.9
  Bottom Layer w10: v1(1181.05,2553.2) 1284.06,2450.19 C204.1 1284.06,2263.16 1282.09,2261.2 R204.1
NetC205_1: C205.1 R205.1 U4.4 | length 277.4
  Top Layer w10: v1(965.95,2409.14) 975,2418.2 U4.4
  Bottom Layer w10: v1(965.95,2409.14) C205.1 965.95,2263.16 967.91,2261.2 R205.1
NetC206_2: C206.2 U2.11 U2.24 | length 957
  Top Layer w10: C206.2 4059.06,2912.54 4125,2846.59 U2.24 4125,2782.24 4158.05,2749.2 4171.05,2749.2 4301.05,2619.2 4567.05,2619.2 v1(4608.05,2660.2) ; v1(4608.05,2535.2) 4625,2518.24 U2.11
  Bottom Layer w10: v1(4608.05,2535.2) v1(4608.05,2660.2)
NetC207_2: C207.2 U3.11 U3.24 | length 1194.2
  Top Layer w10: C207.2 2409.06,2873.2 2445.06,2837.2 2475,2837.2 U3.24 v1(2475,2762.2) ; U3.11 2975,2517.2 2985.01,2527.21 3057.04,2527.21 v1(3065.05,2519.2)
  Bottom Layer w10: v1(2475,2762.2) 2559.05,2678.15 2559.05,2585.2 2576.05,2568.2 2700.05,2568.2 2790.05,2658.2 2926.05,2658.2 v1(3065.05,2519.2)
NetC208_2: C208.2 U4.11 U4.24 | length 882.6
  Top Layer w10: C208.2 759.06,2873.2 795.06,2837.2 825,2837.2 U4.24 825,2759.2 944,2640.2 1102.19,2640.2 1139.9,2602.49 1226.75,2602.49 1308.05,2521.2 1308.05,2472.83 U4.11
NetC216_2: C216.2 D201.1 U2.15 | length 502.5
  Top Layer w10: C216.2 4584.06,2892.25 4575,2883.2 U2.15 4589.05,2827.16 4589.05,2745.74 4701.59,2633.2 4806.1,2633.2 D201.1
NetC217_1: C217.1 R213.2 | length 100.8
  Top Layer w10: C217.1 4848.05,2859.05 4850.02,2857.09 R213.2
NetC217_2: C217.2 U2.22 | length 1957.7
  Top Layer w10: U2.22 4225,2873.2 4207,2891.2 4174.05,2891.2 4146.05,2919.2 4146.05,3061.2 4083.05,3124.2 4083.05,3296.78 4204.46,3418.2 4690.05,3418.2 4723.05,3385.2 4723.05,2766.94 4749.05,2740.94 C217.2
NetC218_2: C218.2 D203.1 U3.15 | length 517.7
  Top Layer w10: C218.2 2934.06,2892.25 2925,2883.2 U3.15 2925,2681.2 2957,2649.2 3156.1,2649.2 D203.1
NetC219_1: C219.1 R214.2 | length 100.8
  Top Layer w10: C219.1 3198.05,2740.94 3200.02,2742.91 R214.2
NetC219_2: C219.2 U3.22 | length 1737.3
  Top Layer w10: U3.22 2575,2862.2 2483.05,2937.2 2483.05,3367.2 2526.05,3410.2 2974.05,3410.2 3102.05,3282.2 3102.05,2867.05 C219.2
NetC220_2: C220.2 D205.1 U4.15 | length 471.1
  Top Layer w10: U4.15 1275,2883.2 1284.06,2892.25 C220.2 1352.95,3018.9 D205.1
NetC221_1: C221.1 R215.2 | length 100.8
  Top Layer w10: C221.1 1557.64,2740.94 1559.61,2742.91 R215.2
NetC221_2: C221.2 U4.22 | length 1439.8
  Top Layer w10: U4.22 925,2735.2 994,2666.2 1205.05,2666.2 1303.05,2568.2 1410.05,2568.2 1445.05,2603.2 1605.05,2603.2 1651.05,2649.2 1651.05,2938.2 1630.05,2959.2 1566.05,2959.2 1515.05,2908.2 1515.05,2859.05 C221.2
NetD200_1: D200.1 D201.2 R213.1 | length 365.8
  Top Layer w10: D201.2 4893.9,2693.2 4900,2699.3 R213.1 4942.05,2742.91 4951.05,2751.91 4951.05,2906.1 4926.05,2931.1 D200.1
NetD202_1: D202.1 D203.2 R214.1 | length 363.4
  Top Layer w10: D203.2 3243.9,2649.2 3269.05,2649.2 3301.05,2681.2 3301.05,2842.09 3286.05,2857.09 R214.1 D202.1
NetD204_1: D204.1 D205.2 R215.1 | length 544.1
  Top Layer w10: D204.1 1593.9,2681.2 1574.9,2700.2 1462.05,2700.2 1449.05,2713.2 1449.05,2778.2 1470.05,2799.2 1529.16,2799.2 1587.05,2857.09 R215.1 1616.05,2857.09 1616.05,2931.1 D205.2
NetD301_1: D301.1 K301.5 Q301.3 | length 391.1
  Top Layer w14.17: Q301.3 1825,995.24 1862.05,958.2
  Top Layer w14.88: D301.1 1862.05,868.15
  Top Layer w20: K301.5 1740.05,850 1758.95,831.1 D301.1 ; 1862.05,868.15 1862.05,958.2
NetD302_1: D302.1 P306.2 Q302.3 | length 329.2
  Top Layer w14.88: 1693.9,2054.53 D302.1
  Top Layer w20: 1693.9,2054.53 P306.2 ; D302.1 Q302.3
NetJ2_1: J2.1 J2.6 U2.16 | length 1880.7
  Top Layer w20.08: U2.16 4525,2768.24 v2(4541.05,2752.2)
  Top Layer w60: J2.1 4131.89,3277.36 J2.6
  Bottom Layer w60: J2.6 4287.73,3433.2 4928.05,3433.2 4976.05,3385.2 4976.05,3199.63 4541.05,2764.63 v2(4541.05,2752.2)
NetJ2_2: J2.2 J2.7 U2.8 | length 1021.8
  Top Layer w20.08: v1(4449.05,2581.2) 4449.05,2541.2 4475,2515.24 U2.8
  Top Layer w60: v2(4201.05,2939.2) 4201.05,3148.2 J2.2 4240.95,3277.36 J2.7
  Bottom Layer w60: v2(4201.05,2939.2) 4229.05,2939.2 4391.05,2777.2 4391.05,2639.2 v1(4449.05,2581.2)
NetJ2_3: J2.3 J2.8 U2.21 | length 558.4
  Top Layer w20.08: U2.21 4275,3072.1
  Top Layer w60: 4275,3072.1 4314.72,3111.82 4314.72,3184.8 J2.3 4350,3277.36 J2.8
NetJ2_4: J2.4 J2.9 U2.5 | length 1308.5
  Top Layer w20.08: v1(4324.05,2368.2) 4324.05,2444.24 U2.5
  Top Layer w60: J2.9 4513.58,3274.61 J2.4 4542.05,3137.09 v1(4542.05,3057.2)
  Bottom Layer w60: v1(4324.05,2368.2) 4337.05,2381.2 4411.05,2381.2 4522.8,2492.95 4522.8,2629.44 4463.05,2689.2 4463.05,2817.2 4542.05,2896.2 v1(4542.05,3057.2)
NetJ3_1: J3.1 J3.6 U3.16 | length 851.7
  Top Layer w20.08: U3.16 v2(2875,3013.2)
  Top Layer w60: v2(2531.89,3045.2) J3.1 2531.89,3277.36 J3.6
  Bottom Layer w60: v2(2531.89,3045.2) 2843,3045.2 v2(2875,3013.2)
NetJ3_2: J3.2 J3.7 U3.8 | length 2052.1
  Top Layer w20.08: U3.8 v2(2825,2605.2)
  Top Layer w60: J3.2 2640.95,3277.36 J3.7
  Bottom Layer w60: J3.2 2640.95,3181.09 2578.05,3118.2 2458.89,3118.2 2378.89,3038.2 2127.05,3038.2 2090.05,3001.2 2090.05,2738.2 2305.05,2523.2 2743,2523.2 v2(2825,2605.2)
NetJ3_3: J3.3 J3.8 U3.21 | length 604
  Top Layer w20.08: 2607.36,3077.44 2607.36,2861.31 2625,2861.31 U3.21
  Top Layer w60: 2607.36,3077.44 J3.3 2750,3277.36 J3.8
NetJ3_4: J3.4 J3.9 U3.5 | length 1071.3
  Top Layer w20.08: U3.5 2675,2588.24
  Top Layer w60: v2(2627.05,2636.2) 2675,2588.24 ; J3.4 2913.58,3274.61 J3.9
  Bottom Layer w60: v2(2627.05,2636.2) 2948.05,2957.2 2948.05,3131.09 J3.4
NetJ4_1: J4.1 J4.6 U4.16 | length 923
  Top Layer w20.08: U4.16 v2(1225,3020.2)
  Top Layer w60: v2(852.05,3020.2) 852.05,3165.24 J4.1 906.89,3277.36 J4.6
  Bottom Layer w60: v2(852.05,3020.2) v2(1225,3020.2)
NetJ4_2: J4.2 J4.7 U4.8 | length 1987.2
  Top Layer w20.08: U4.8 1175,2413.2 1307,2281.2
  Top Layer w60: J4.2 1062.56,3266.69 1062.56,3294.81 1070.47,3302.72 J4.7 ; 1307,2281.2 v2(1384.05,2281.2)
  Bottom Layer w60: J4.7 1146.78,3408.2 1322.05,3408.2 1417.05,3313.2 1417.05,2818.2 1304.05,2705.2 1304.05,2559.2 1384.05,2479.2 v2(1384.05,2281.2)
NetJ4_3: J4.3 J4.8 U4.21 | length 589.4
  Top Layer w20.08: U4.21 975,3018.62
  Top Layer w60: 975,3018.62 1125,3168.62 J4.3 1136.83,3231.91 1136.83,3260.03 1179.53,3302.72 J4.8
NetJ4_4: J4.4 J4.9 U4.5 | length 1052.4
  Top Layer w20.08: v1(993.05,2537.2) 1001.05,2537.2 1025,2513.24 U4.5
  Top Layer w60: J4.4 1288.58,3274.61 J4.9
  Bottom Layer w60: v1(993.05,2537.2) 993.05,2593.2 1298.05,2898.2 1298.05,3156.09 J4.4
NetJ301_1: J301.1 R302.2 U1.1.1 | length 2710
  Top Layer w10: U1.1.1 4502.05,2108.35 4502.05,1225.2 4519.05,1208.2 v1(4614.05,1208.2) ; R302.2 5067.91,1362.2 5097.05,1362.2 5106.05,1353.2 v1(5106.05,1216.2)
  Bottom Layer w10: v1(4614.05,1208.2) 5360.05,1208.2 5393.05,1241.2 5393.05,1265.2 ; v1(5106.05,1216.2) 5344.05,1216.2 5393.05,1265.2 ; J301.1 5390.05,1400.98 ; 5390.05,1400.98 5393.05,1397.98 ; 5390.05,1400.98 5393.05,1400.98 5393.05,1397.98 ; 5393.05,1265.2 5393.05,1397.98 ; 5393.05,1265.2 5401.05,1273.2 5401.05,1389.98 5393.05,1397.98
NetJ301_2: J301.2 R301.2 U1.1.2 | length 2649.7
  Top Layer w10: v1(4708.05,2209.2) 4708.05,1836.06 5067.91,1476.2 R301.2
  Bottom Layer w10: U1.1.2 4502.9,2209.2 v1(4708.05,2209.2) 4894.82,2209.2 4915.32,2229.7 5212.98,2229.7 5470.08,1972.59 5470.08,1506.23 5408.14,1444.29 J301.2
NetJ301_7: J301.7 R304.2 U1.2.2 | length 4609
  Top Layer w10: R304.2 5067.91,1688.2 5091.05,1688.2 5108.05,1705.2 v1(5108.05,1851.78)
  Bottom Layer w10: U1.2.2 2098.75,2208.2 3355.05,2208.2 3635.42,1927.83 4171.42,1927.83 4191.05,1908.2 4480.05,1908.2 4501.05,1929.2 4501.05,1983.2 4526.05,2008.2 4763.32,2008.2 4934.82,2179.7 5175.6,2179.7 5415.05,1940.24 5415.05,1826.2 ; v1(5108.05,1851.78) 5389.46,1851.78 5415.05,1826.2 ; J301.7 5390.05,1660.83 5415.05,1685.83 5415.05,1826.2
NetJ301_8: J301.8 R303.2 U1.2.1 | length 4415.1
  Top Layer w10: v1(4729.05,2297.2) 4729.05,2240.2 5067.91,1901.33 5067.91,1881.2 ; R303.2 5067.91,1881.2 ; v1(5254.05,1703.2) 5254.05,1945.2 5222.05,1977.2 5163.91,1977.2 5067.91,1881.2
  Bottom Layer w10: U1.2.1 2098.75,2108.2 2014.05,2108.2 1976.05,2146.2 1976.05,2313.2 1993.05,2330.2 4095.99,2330.2 4120.5,2305.68 4223.49,2305.68 4241,2323.2 4397.05,2323.2 4410.05,2336.2 4690.05,2336.2 v1(4729.05,2297.2) ; v1(5254.05,1703.2) 5254.99,1704.13 J301.8
NetK301_3: K301.3 P305.2 | length 1193.7
  Top Layer w75: K301.3 1468.14,1343.14 1468.14,805.29 P305.2
NetR207_1: R207.1 U2.3 | length 384
  Top Layer w20.08: 4197.72,2559.48 4225,2532.2 U2.3
  Top Layer w38.48: R207.1 4031.05,2440.94 4031.05,2465.2 4125.33,2559.48
  Top Layer w60: 4125.33,2559.48 4197.72,2559.48
NetR208_1: R208.1 U2.10 | length 461
  Top Layer w20.08: U2.10 4575,2497.29 4570.01,2497.29 4570.01,2573.37 4575,2573.37 4575,2580.63 4612.91,2580.63 4626.48,2594.2
  Top Layer w38.48: 4654.05,2594.2 4727.05,2521.2 4727.05,2479.94 4766.05,2440.94 R208.1
  Top Layer w60: 4626.48,2594.2 4654.05,2594.2
NetR209_1: R209.1 U3.3 | length 364.1
  Top Layer w20.08: 2565.05,2393.2 2575,2403.15 U3.3
  Top Layer w38.48: R209.1 2324.05,2440.94 2324.05,2409.2 2340.05,2393.2 2565.05,2393.2
NetR210_1: R210.1 U3.10 | length 320.9
  Top Layer w20.08: U3.10 2925,2521.2 2971.15,2567.34
  Top Layer w38.48: 2971.15,2567.34 3112.39,2567.34 3120.68,2559.05 R210.1
NetR211_1: R211.1 U4.3 | length 356.7
  Top Layer w20.08: 884.06,2384.26 925,2425.2 U4.3
  Top Layer w38.48: R211.1 721.41,2440.94 721.41,2409.2 746.34,2384.26 884.06,2384.26
NetR212_1: R212.1 U4.10 | length 346.1
  Top Layer w20.08: U4.10 1275,2421.5 1319.3,2377.2
  Top Layer w38.48: 1397.3,2377.2 1461.05,2440.94 R212.1
  Top Layer w60: 1319.3,2377.2 1397.3,2377.2
SD_CARDDET: J301.A R306.1 U1.2.23 | length 3111.5
  Top Layer w10: v1(4997.4,1347.85) 5025.05,1320.2 5067.91,1320.2 R306.1
  Bottom Layer w10: U1.2.23 3417.13,1057.87 3667.45,1308.2 4675,1308.2 4693.43,1289.77 4741,1289.77 4757.73,1306.5 J301.A 4956.05,1306.5 v1(4997.4,1347.85)
SD_CLK: J301.5 U1.1.3 | length 1493.9
  Bottom Layer w10: U1.1.3 4752.73,2057.87 4884.05,2189.2 4905.05,2189.2 4915.55,2199.7 5188.55,2199.7 5435.05,1953.2 5435.05,1598.2 5411.06,1574.21 J301.5
SD_CMD: J301.3 R305.1 U1.1.4 | length 2711.8
  Top Layer w10: v1(4760.05,2127.2) 5017.05,1870.2 5017.05,1648.2 5054.05,1611.2 5067.91,1611.2 R305.1 5067.91,1562.2 5100.05,1562.2 5140.05,1522.2 5140.05,871.2 5182.05,829.2 5310.05,829.2 5320.05,839.2 5320.05,1443.2 v1(5280.05,1483.2)
  Bottom Layer w10: U1.1.4 4501.9,2108.2 4741.05,2108.2 v1(4760.05,2127.2) ; v1(5280.05,1483.2) 5284.45,1487.6 J301.3
SPI_MISO: P303.3 U1.1.35 | length 935
  Bottom Layer w10: U1.1.35 4763.73,457.87 4874.05,568.2 4874.05,705.2 4894.05,725.2 5225.2,725.2 P303.3
SPI_MOSI: P303.5 U1.1.37 | length 1274.9
  Bottom Layer w10: U1.1.37 5001.73,357.87 5145.05,501.2 5375,501.2 5420.05,546.24 5420.05,697.2 5392.05,725.2 5325.2,725.2 P303.5
SPI_SCK: P303.4 U1.2.25 | length 3440.9
  Bottom Layer w10: U1.2.25 2193.1,913.2 4307.05,913.2 4402.05,1008.2 5244.05,1008.2 5325.05,927.2 5325.05,824.95 P303.4
SPI_SS: P303.2
STEPPER_EN: U1.1.38 U2.14 U3.14 U4.14 | length 7088
  Top Layer w10: U4.14 1325,2880.15 1368.05,2923.2 v1(1482.05,2923.2) ; 2804.05,3234.2 2804.05,3159.2 2849,3159.2 2975,3033.2 U3.14 ; v1(4373.05,3088.2) 4455.05,3006.2 4606.05,3006.2 4625,2987.24 U2.14 v1(4625,2764.2) ; U1.1.38 4382.13,427.32 4382.13,776.27 4414.05,808.2 4631.05,808.2 4647.05,824.2 4647.05,2243.2 4658.05,2254.2 4658.05,2305.2 4641.05,2322.2 v1(4641.05,2370.2)
  Bottom Layer w10: v1(1482.05,2923.2) 1718.05,3159.2 2299.05,3159.2 2409.05,3269.2 2782.05,3269.2 2804.05,3234.2 2846.05,3276.2 3030.05,3276.2 3218.05,3088.2 v1(4373.05,3088.2) ; v1(4625,2764.2) 4641.05,2748.15 v1(4641.05,2370.2)
STEPPER_RESET: U1.1.36 U2.23 U3.23 U4.23 | length 8165.8
  Top Layer w10: U4.23 875,2887.2 924.05,2936.24 924.05,3127.2 962.05,3165.2 962.05,3262.2 1022.05,3322.2 1022.05,3362.2 1054.05,3394.2 2317.05,3394.2 2371.05,3340.2 2371.05,2899.2 2388.05,2882.2 2388.05,2851.2 2432.05,2807.2 2432.05,2742.2 2445.05,2729.2 2509.05,2729.2 2525,2745.15 U3.23 2525,2855.2 2474,2906.2 v1(2458.05,2906.2) ; v1(4079.55,2404.7) 4079.55,658.7 4441.05,297.2 4473.05,297.2 4501.05,325.2 4501.05,408.4 U1.1.36 ; U2.23 4175,2778.46 4270.05,2683.41 4307.83,2683.41 v1(4333.05,2658.2)
  Bottom Layer w10: v1(2458.05,2906.2) 2579.05,2785.2 2579.05,2615.2 2606.05,2588.2 2677.05,2588.2 2779.05,2690.2 4273.87,2690.2 4305.87,2658.2 v1(4333.05,2658.2) v1(4079.55,2404.7)
USART_CTS: P304.2 U1.2.14 | length 3734.5
  Bottom Layer w10: U1.2.14 1998.05,1507.5 1998.05,1009.2 1999.05,1008.2 2068.05,1008.2 2098.05,978.2 2098.05,825.2 2115.05,808.2 4603.05,808.2 4715.05,920.2 4879.8,920.2 P304.2
USART_RTS: P304.4 U1.2.12 | length 3436.3
  Top Layer w10: v1(4708.05,1323.2) 4879.8,1151.44 4879.8,820.2 P304.4
  Bottom Layer w10: U1.2.12 2098.1,1608.2 2198.05,1608.2 2398.05,1408.2 4623.05,1408.2 v1(4708.05,1323.2)
USART_RX: P304.5 U1.2.33 | length 2725.1
  Bottom Layer w10: U1.2.33 2198.75,608.2 4758.2,608.2 P304.5
USART_TX: P304.3 U1.2.21 | length 2890.5
  Top Layer w10: U1.2.21 v1(2598.1,708.2)
  Bottom Layer w10: v1(2598.1,708.2) 4758.2,708.2 P304.3
X_AXIS_CTRL: U1.1.30 U2.13 | length 3696
  Top Layer w10: U1.1.30 4402.13,708.42 4402.13,633.2 4427.13,608.2 4668.05,608.2 4780.05,720.2 5395.05,720.2 5420.05,745.2 5420.05,2076.2 4862.05,2634.2 4823.05,2684.2 4690,2684.2 4675,2699.2 U2.13
X_AXIS_DIR: U1.1.28 U2.2 | length 1729.5
  Top Layer w10: U2.2 4175,1943.88 4191.05,1927.83 4191.05,1118.4 U1.1.28
X_AXIS_STEP: U1.1.32 U2.12 | length 1987.4
  Top Layer w10: U1.1.32 4501.9,708.2 4634.05,708.2 4675,749.15 4675,2220.06 4678.05,2223.11 4678.05,2322.15 4675,2325.2 U2.12
X_CLK: U1.2.13 U2.1 | length 3207.9
  Top Layer w10: U2.1 4125,2422.24 4150.05,2397.2 4150.05,1902.2 v1(4158.05,1894.2)
  Bottom Layer w10: U1.2.13 2109.2,1567.04 2068.04,1608.2 2014.05,1608.2 1998.05,1624.2 1998.05,1892.2 2014.05,1908.2 2870.05,1908.2 2884.05,1894.2 v1(4158.05,1894.2)
X_END_MAX: J302.2 U1.2.34 | length 1618.6
  Bottom Layer w10: U1.2.34 2098.1,508.2 3394.36,508.2 J302.2
X_END_MIN: J302.1 U1.2.6 U1.2.15 | length 3090.6
  Top Layer w10: U1.2.6 2098.05,1908.25 2098.05,1508.25 U1.2.15 ; v1(3621.05,1327.2) 3681.69,1266.55 J302.1
  Bottom Layer w10: U1.2.15 2279.1,1327.2 v1(3621.05,1327.2)
Y_CLK: U1.2.5 U3.1 | length 800.6
  Top Layer w10: U1.2.5 2198.05,2007.5 2198.05,2439.2 2238.05,2479.2 2428.05,2479.2 2430.05,2477.2 2475,2477.2 U3.1
Y_CTRL: U1.1.21 U3.13 | length 2922
  Top Layer w10: U3.13 3025,2740.2 3078,2687.2 3166.05,2687.2 3187.05,2666.2 v1(3267.05,2569.2) ; v1(4208.05,2339.2) 4221.05,2326.2 4221.05,1291.2 4404.05,1108.2 4501.9,1108.2 U1.1.21
  Bottom Layer w10: v1(3267.05,2569.2) 3838.05,2569.2 4057.05,2350.2 4197.05,2350.2 v1(4208.05,2339.2)
Y_DIR: U1.2.3 U3.2 | length 876.9
  Top Layer w10: U1.2.3 2098.05,2108.25 2098.05,2378.2 2233.05,2513.2 2420.05,2513.2 2435.05,2528.2 2510.05,2528.2 2525,2513.24 U3.2
Y_END_MAX: J302.3 J302.4 U1.1.34 | length 1314.4
  Bottom Layer w10: J302.4 J302.3 3512.31,281.2 3600.05,281.2 3632.05,313.2 3632.05,454.2 3735.73,557.87 U1.1.34
Y_STEP: U1.2.17 U3.12 | length 1588.9
  Top Layer w10: U1.2.17 2337.73,1357.87 2947.05,1967.2 2947.05,2367.24 3025,2445.2 U3.12
Z_CLK: U1.2.28 U4.1 | length 2478.9
  Top Layer w10: v1(773.05,2451.2) 825,2451.2 U4.1
  Bottom Layer w10: v1(773.05,2451.2) 773.05,2017.2 1072.05,1718.2 1245.05,1718.2 1641.05,1322.2 1886.05,1322.2 1927.05,1281.2 1927.05,912.87 1982.05,857.87 U1.2.28
Z_CTRL: U1.2.30 U4.13 | length 2683.3
  Top Layer w10: v1(1259.05,2752.2) 1342.05,2752.2 1375,2785.15 U4.13 ; v1(1730.05,2183.2) 1835.05,2078.2 1835.05,1086.2 1944.05,977.2 1944.05,862.25 U1.2.30
  Bottom Layer w10: v1(1259.05,2752.2) 1259.05,2514.2 1330.05,2443.2 1330.05,2258.2 1405.05,2183.2 v1(1730.05,2183.2)
Z_DIR: U1.2.26 U4.2 | length 2387.1
  Top Layer w10: U4.2 875,2523.15 v1(885.05,2533.2)
  Bottom Layer w10: v1(885.05,2533.2) 885.05,1945.2 1063.05,1767.2 1328.05,1767.2 1748.05,1347.2 1896.05,1347.2 1958.05,1285.2 1958.05,1008.28 2008.45,957.87 U1.2.26
Z_END_MAX: J302.6 U1.2.22 | length 2040.2
  Top Layer w10: U1.2.22 2079.05,1157.87 2079.05,1179.2 2099.81,1179.2 2128.81,1208.2 2359.05,1208.2 2754.05,813.2 2754.05,232.2 2817.05,169.2 3115.05,169.2 3136.42,190.57 J302.6
Z_END_MIN: J302.5 U1.2.24 | length 1861.7
  Top Layer w10: v1(3245.05,950.2) 3245.47,949.77 J302.5
  Bottom Layer w10: U1.2.24 2098.1,1008.2 3187.05,1008.2 v1(3245.05,950.2)
Z_STEP: U1.2.16 U4.12 | length 1919.2
  Top Layer w10: U4.12 1375,2496.2 v1(1555.05,2496.2) ; U1.2.16 2006.05,1457.87 1998.05,1465.87 1998.05,1992.2 2014.05,2008.2 2081.05,2008.2 2098.05,2025.2 2098.05,2078.19 2068.91,2107.32 2024.92,2107.32 1998.98,2133.27 1998.98,2198.12 2066.05,2265.2 v1(2066.05,2403.2)
  Bottom Layer w10: v1(1555.05,2496.2) 1973.05,2496.2 v1(2066.05,2403.2)
pads on no net: J1.H1 J1.H2 J2.5 J3.5 J4.5 J302.7 J302.8 K301.2 U1.1.7 U1.1.9 U1.1.10 U1.1.11 U1.1.12 U1.1.13 U1.1.14 U1.1.15 U1.1.17 U1.1.18 U1.1.23 U1.1.24 U1.1.25 U1.1.26 U1.1.27 U1.1.29 U1.1.31 U1.1.33 U1.2.8 U1.2.10 U1.2.11 U1.2.18 U1.2.20 U1.2.27 U1.2.29 U1.2.31 U1.2.35 U1.2.36 U1.2.37 U1.2.38

## Polygon pours and split planes (outlines as drawn)
GND on Top Layer "top layer-GND" (solid, remove dead copper, pour order 2): -25,3575 5550,3575 5550,-25 -25,-25 -25,3575
GND on Bottom Layer "Bottom layer-GND" (solid, remove dead copper, pour order 4): -25,3575 5550,3575 5550,-25 -25,-25 -25,3575

## Keep-outs
Top Layer:
  rectangle: 225,75 600,225
Bottom Layer:
  rectangle: 225,75 600,225
Keep-Out Layer:
  the board outline again, w10

## Other copper
Top Layer:
  text "Top" at 350,125 h60
Bottom Layer:
  text "Bottom" at 575,125 h60

## Text inside footprints (layer, text, board x,y; h text height)
J1: Top Overlay "AC 120/240V" at 330,1045 h60 r90
J2: Top Overlay "1" at 4122.05,3084.06 h59.06; Top Overlay "5" at 4548.43,3084.06 h59.06; Top Overlay "9" at 4493.9,3454.13 h59.06; Top Overlay "6" at 4166.73,3454.13 h59.06
J3: Top Overlay "1" at 2522.05,3084.06 h59.06; Top Overlay "5" at 2948.43,3084.06 h59.06; Top Overlay "9" at 2893.9,3454.13 h59.06; Top Overlay "6" at 2566.73,3454.13 h59.06
J4: Top Overlay "1" at 897.05,3084.06 h59.06; Top Overlay "5" at 1323.43,3084.06 h59.06; Top Overlay "9" at 1268.9,3454.13 h59.06; Top Overlay "6" at 941.73,3454.13 h59.06
J302: Top Overlay "1" at 3691.54,469.88 h59.06 r180; Top Overlay "8" at 2920,469.88 h59.06 r180; Top Overlay "15" at 3017.13,95.87 h59.06 r180; Top Overlay "9" at 3646.85,95.87 h59.06 r180
P303: Top Overlay "1" at 5255,955 h50 r270; Top Overlay "2" at 5355,975 h50 r270; Top Overlay "5" at 5255,615 h50 r270; Top Overlay "6" at 5355,615 h50 r270
P304: Top Overlay "1" at 4805,955 h50 r270; Top Overlay "2" at 4905,975 h50 r270; Top Overlay "5" at 4805,615 h50 r270; Top Overlay "6" at 4905,615 h50 r270
S1: Top Overlay "~" at 1200,650 h60 r90; Top Overlay "+12V" at 1275,1100 h60 r90; Top Overlay "GND" at 1275,1675 h60 r90; Top Overlay "230V" at 1275,550 h60 r90
U1: Bottom Overlay "CONN-1" at 4251.57,1507.87 h60 r90; Bottom Overlay "CONN-2" at 2348.43,1507.87 h60 r90